# Altium PCB main.PcbDoc
Units mil, origin at the board's own origin, x right, y up, seen from the top; angles counter-clockwise.
Board outline 885.83 x 807.09 mil, 4 copper layers (Top Layer, Layer 1, Layer 2, Bottom Layer), stack 23.756 mil thick; 34 components, 17 nets, 109 pads, 61 vias.
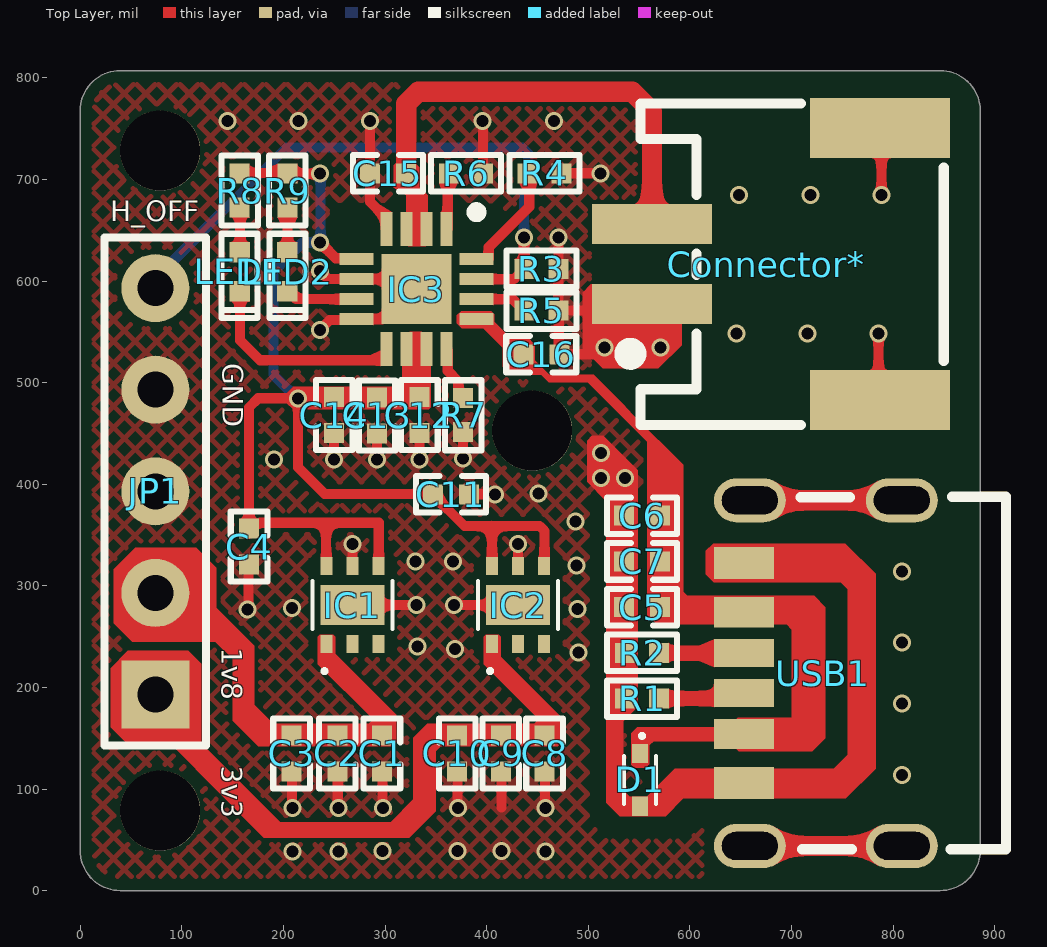
[diagram p0: Top Layer view]
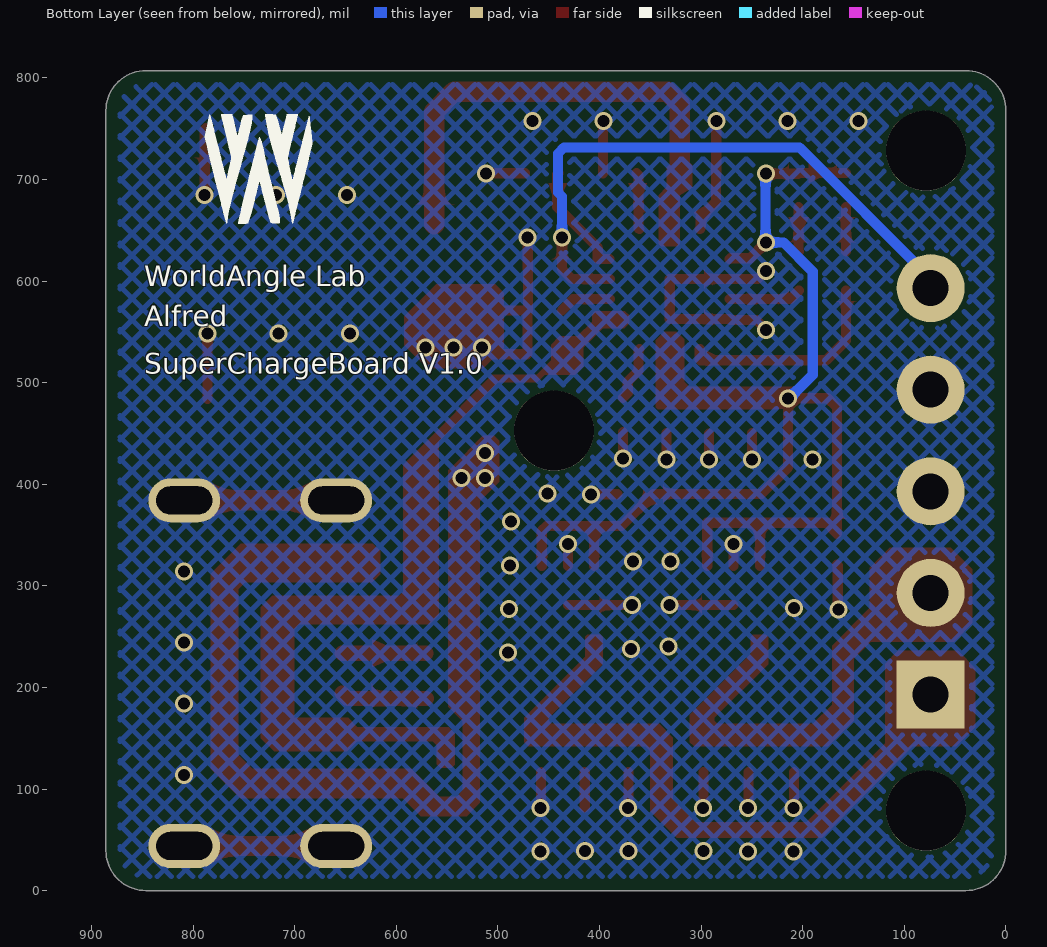
[diagram p1: Bottom Layer view, seen from below]
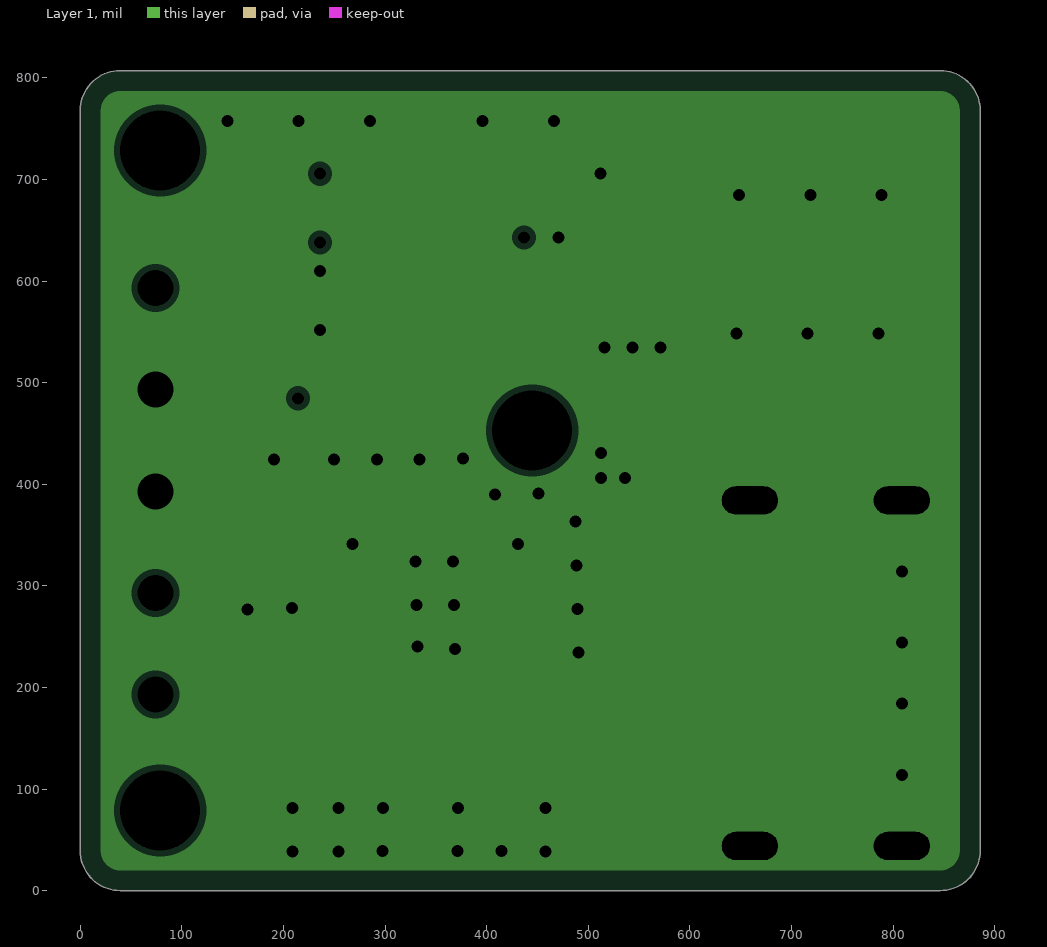
[diagram p2: Layer 1, clearances drawn from the general rule]
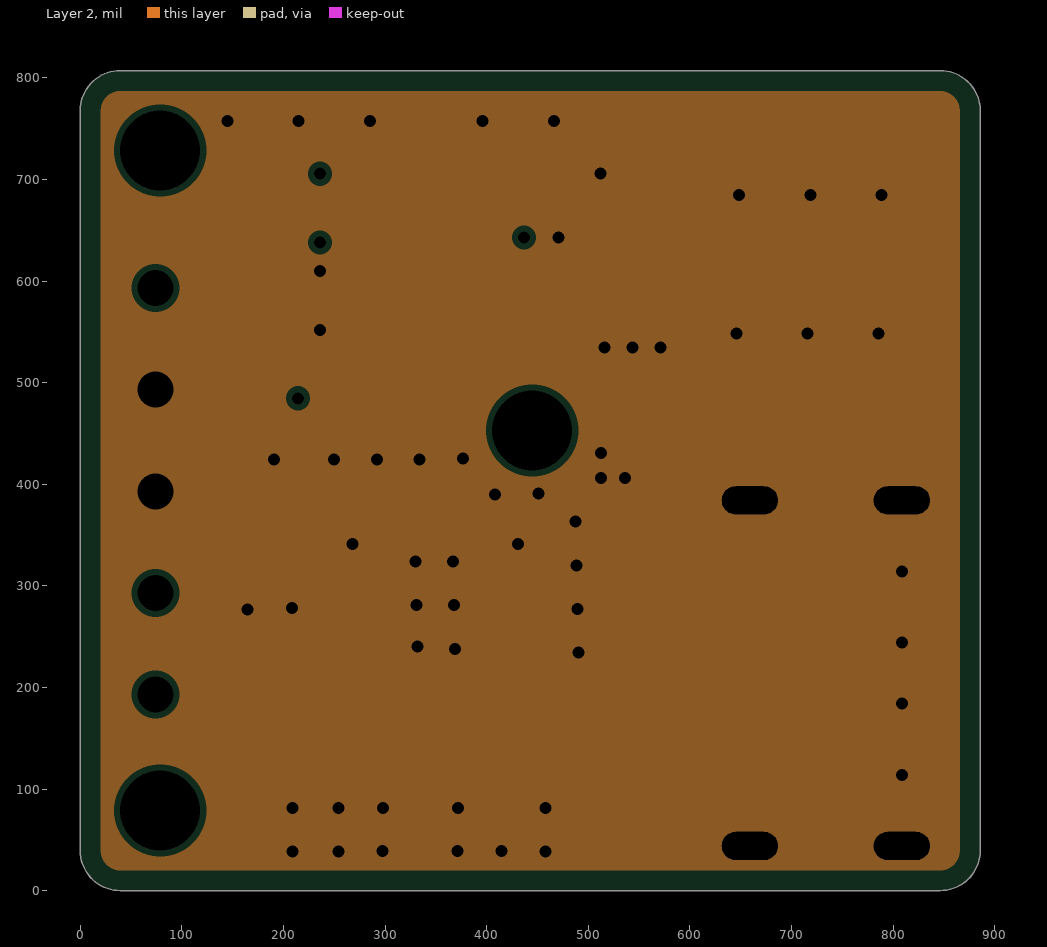
[diagram p3: Layer 2, clearances drawn from the general rule]

## Layer stack, top to bottom
Top Solder: solder mask 0.4, Solder Resist, Dk 3.5
Top Layer: signal copper 1.4
Dielectric 2: prepreg 2.8, PP-006, Dk 4.1
Layer 1: plane copper 1.378, net GND
Dielectric 1: dielectric 12.6, FR-4, Dk 4.8
Layer 2: plane copper 1.378, net GND
Dielectric 3: prepreg 2.8, PP-006, Dk 4.1
Bottom Layer: signal copper 1.4
Bottom Solder: solder mask 0.4, Solder Resist, Dk 3.5

## Board outline
0,39.37 0,767.72 cw(c39.37,767.72) 39.37,807.09 846.46,807.09 cw(c846.46,767.72) 885.83,767.72 885.83,39.37 cw(c846.46,39.37) 846.46,0 39.37,0 cw(c39.37,39.37)

## Design rules (kind name [scope] priority, off if disabled: settings)
AssemblyTestpoint [All] p1: testpointundercomponent=TRUE minsize=40 maxsize=100 preferedsize=60 minholesize=0 maxholesize=40 preferedholesize=32 testpointgrid=1 usegrid=TRUE gridoriginx=5938.69 gridoriginy=1846 gridtolerance=0.01 allowsidetop=TRUE allowsidebottom=TRUE
BoardOutlineClearance [All] p1: gap=10 ignorepadtopadclearanceinfootprint=FALSE
Clearance [All] p1: gap=4 ignorepadtopadclearanceinfootprint=FALSE
FabricationTestpoint [All] p1: side=3 testpointundercomponent=TRUE minsize=40 maxsize=100 preferedsize=60 minholesize=0 maxholesize=40 preferedholesize=32 testpointgrid=1 allowsidetop=TRUE allowsidebottom=TRUE usegrid=TRUE gridoriginx=5938.69 gridoriginy=1846 gridtolerance=0.01
PlaneClearance [All] p1: clearance=6
PlaneConnect [All] p1: pad.planeconnectstyle=Relief pad.reliefexpansion=20 pad.reliefentries=4 pad.reliefconductorwidth=10 pad.reliefairgap=10 via.planeconnectstyle=Direct via.reliefexpansion=20 via.reliefentries=4 via.reliefconductorwidth=10 via.reliefairgap=10
PolygonConnect [All] p1: connectstyle=Direct reliefconductorwidth=10 reliefentries=4 polygonreliefangle="90 Angle" airgapwidth=10
RoutingVias [All] p1: holewidth=28 width=50 viastyle="Through Hole" minholewidth=28 minwidth=50 maxholewidth=28 maxwidth=50
SolderMaskExpansion [All] p1: expansion=4 istentingtop=FALSE
SupplyNets "Schematic Supply Nets_5" [InNet('3v3')] p1: voltage=0.000
SupplyNets "Schematic Supply Nets_4" [InNet('Vbus')] p2: voltage=0.000
SupplyNets "Schematic Supply Nets_3" [InNet('VBAT+')] p3: voltage=0.000
SupplyNets "Schematic Supply Nets_2" [InNet('1v8')] p4: voltage=0.000
SupplyNets "Schematic Supply Nets_1" [InNet('GND')] p5: voltage=0.000
SupplyNets "Schematic Supply Nets" [InNet('Vpm')] p6: voltage=0.000
Width [All] p1: maxlimit=30 minlimit=10 preferedwidth=10 minimp=50.000000 maximp=50.000000 favimp=50.000000
26 further rules are at their usual default settings.

## Components (designator, comment, footprint, x,y, rotation, side; value= is the part's Value field where it differs from the comment)
C1 "2.2uF" C0402_L 297,135 r270 top
C2 "10uF(NC)" C0402_L 253,135 r270 top
C3 "0.1uF(NC)" C0402_L 208,135 r270 top
C4 "1uF" C0402_L 166.2,338.5 r270 top
C5 "10uF(NC)" C0402_L 553,279 r180 top
C6 "0.1uF(NC)" C0402_L 553,369 r0 top
C7 "1uF" C0402_L 553,324 r180 top
C8 "2.2uF" C0402_L 457,135 r270 top
C9 "10uF(NC)" C0402_L 414,135 r270 top
C10 "0.1uF(NC)" C0402_L 371,135 r270 top
C11 "1uF" C0402_L 364.78,390.1 r0 top
C12 "4.7uF" C0402_L 333.93,468 r270 top
C13 "10uF(NC)" C0402_L 292.13,467.68 r270 top
C14 "0.1uF(NC)" C0402_L 249.93,468 r270 top
C15 "4.7uF" C0402_L 302.93,706 r0 top
C16 "1uF" C0402_L 453.83,527.9 r0 top
Connector* "ZX-PH2.0-WT2P" ZX-PH2.0-WT2P 675,616.54 r90 top
D1 "LESD5D5.0CT1G" LESD5D50CT1G 551,109 r270 top
IC1 "TPS7A2618DRVR" TPS7A2633DRVR 268,281 r90 top
IC2 "TPS7A2633DRVR" TPS7A2633DRVR 431,281 r90 top
IC3 "BQ24075QRGTRQ1" QFN50P300X300X100-17N-D 330.93,592 r270 top
JP1 "HDR-1X5" HDR2.54-LI-5P 74,393 r90 top
LED1 "NCD0402R1" LED0402_R 156.93,609 r270 top
LED2 "NCD0402W1" LED0402_W 203.93,609 r270 top
R1 "5.1K(1%)" R0402_L 553,189 r0 top
R2 "5.1K(1%)" R0402_L 553,234 r0 top
R3 "1K" R0402_L 453.83,611.9 r180 top
R4 "1.8k" R0402_L 456.93,706 r0 top
R5 "45k" R0402_L 453.83,570.9 r180 top
R6 "10k" R0402_L 379.93,706 r0 top
R7 "1.5k" R0402_L 376.93,468 r90 top
R8 "1.5k" R0402_L 156.93,689 r270 top
R9 "1.5k" R0402_L 203.93,689 r270 top
USB1 "USB_TYPE-C_6Pin" USB-C-SMD_6P 731,214 r180 top

## Footprints (in the part's own frame and the unit in brackets; to place one, negate y for a bottom-side part, rotate by r counter-clockwise, add the part's x,y. Pads: shape width x height; smd on the part's side, far side on the other; paste and mask are expansions set on the pad)
C0402_L [mm] "贴片MLCC电容"
  rect 0.5x0.5 smd: 1(-0.45,0) 2(0.45,0)
  silkscreen extent -0.87,-0.46 0.88,0.46, body extent -0.5,-0.25 0.5,0.25, height 0.5
HDR2.54-LI-5P [mm] "排针，5脚"
  rect 1.7x1.7 hole 0.9: 1(-5.08,0)
  round 1.7 hole 0.9: 2(-2.54,0) 3(0,0) 4(2.54,0) 5(5.08,0)
  silkscreen extent -6.35,-1.27 6.35,1.27, body extent -6.35,-1.27 6.35,1.27, height 2.54
LED0402_R [mil] "红色0402LED"
  rect 20x20 smd: 1(-19.23,0) 2(19.23,0)
  silkscreen extent -38,-18 46,18, body extent -20,-10 20,10, height 8
LED0402_W [mil] "白色0402LED                                联系卖家 免费查找封装"
  rect 20x20 smd: 1(-19.23,0) 2(19.23,0)
  silkscreen extent -38,-18 46,18, body extent -20,-10 20,10, height 8
LESD5D50CT1G [mm]
  rect 0.48x0.4 smd: 1(-0.66,0) 2(0.66,0)
  silkscreen extent -1.15,-0.4 0.6,0.4, body extent -0.8,-0.4 0.8,0.4, height 0.6
QFN50P300X300X100-17N-D [mm]
  rect 0.85x0.3 smd: 1(-1.5,0.75) 2(-1.5,0.25) 3(-1.5,-0.25) 4(-1.5,-0.75) 9(1.5,-0.75) 10(1.5,-0.25) 11(1.5,0.25) 12(1.5,0.75)
  rect 0.3x0.85 smd: 5(-0.75,-1.5) 6(-0.25,-1.5) 7(0.25,-1.5) 8(0.75,-1.5) 13(0.75,1.5) 14(0.25,1.5) 15(-0.25,1.5) 16(-0.75,1.5)
  rect 1.75x1.75 smd: 17(0,0)
  silkscreen extent -2.05,1.38 -1.8,1.63, body extent -1.5,-1.5 1.5,1.5, height 1
R0402_L [mm] "1/16W贴片电阻"
  rect 0.5x0.5 smd: 1(-0.425,0) 2(0.425,0)
  silkscreen extent -0.88,-0.46 0.87,0.46, body extent -0.5,-0.25 0.5,0.25, height 0.3
TPS7A2633DRVR [mm]
  rect 0.45x0.3 smd: 1(-0.975,0.65) 2(-0.975,0) 3(-0.975,-0.65) 4(0.975,-0.65) 5(0.975,0) 6(0.975,0.65)
  rect 1x1.6 smd: 7(0,0)
  silkscreen extent -1.7,-1 0.6,1, body extent -1,-1 1,1, height 0.8
USB-C-SMD_6P [mil] "封装库来自淘宝ID:黄晶宝石"
  oval 70.82x43.31 hole 27.56 slot 55.16 at 0 deg: 0(-77.75,170.08) 0(-77.75,-170.08) 0(71.85,170.08) 0(71.85,-170.08)
  rect 59x27.6 smd: A5(77.76,19.7) B5(77.76,-19.7)
  rect 59x29.9 smd: A9(77.76,-59.85) B9(77.76,59.85)
  rect 59x31.5 smd: A12(77.76,-108.25) B12(77.76,108.25)
  silkscreen extent -180,-174 22,174, body extent -172,-176 95,176, height 127
ZX-PH2.0-WT2P [mm]
  rect 1x3 smd: 1(-1,2.85) 2(1,2.85)
  rect 1.5x3.5 smd: 3(-3.4,-2.85) 4(3.4,-2.85)
  silkscreen extent -4.02,-4.44 4.02,3.59

## Part data
C1 C2 C3 C4 C5 C6 C7 C8 C9 C10 C11 C12 C13 C14 C15 C16: library part C, "贴片电容/MLCC电容", BOM名称=无极性贴片电容, 当前库版本V2024.2.3 @淘宝卖家:黄晶宝石=最新版本发布https://item.taobao.com/item.htm?id=566775463719, 联系下单店铺卖家 免费帮你查找封装="联系下单店铺卖家 免费技术指导"
Connector*: "https://jlcpcb.com/partdetail/Megastar-ZX_PH2_0WT2P/C7429689"
D1: "TVS Diode (Bi-directional)", Manufacturer_Name=LRC, Height=0.7mm, Manufacturer_Part_Number=LESD5D5.0CT1G
IC1: library part TPS7A2633DRVR, "Integrated Circuit", Manufacturer_Name="Texas Instruments", Mouser Part Number=595-TPS7A2633DRVR, Arrow Part Number=TPS7A2633DRVR, Arrow Price/Stock=null?utm_currency=USD&region=nac, Datasheet Link=https://www.ti.com/lit/gpn/TPS7A26, Height=0.8mm, Manufacturer_Part_Number=TPS7A2633DRVR, Mouser Price/Stock=https://www.mouser.co.uk/ProductDetail/Texas-Instruments/TPS7A2633DRVR?qs=OTrKUuiFdkZcobdYhR7qbQ%3D%3D
IC2: "Integrated Circuit", Manufacturer_Name="Texas Instruments", Mouser Part Number=595-TPS7A2633DRVR, Arrow Part Number=TPS7A2633DRVR, Arrow Price/Stock=null?utm_currency=USD&region=nac, Datasheet Link=https://www.ti.com/lit/gpn/TPS7A26, Height=0.8mm, Manufacturer_Part_Number=TPS7A2633DRVR, Mouser Price/Stock=https://www.mouser.co.uk/ProductDetail/Texas-Instruments/TPS7A2633DRVR?qs=OTrKUuiFdkZcobdYhR7qbQ%3D%3D
IC3: "Integrated Circuit", Manufacturer_Name="Texas Instruments", Mouser Part Number=595-BQ24075QRGTRQ1, Arrow Part Number=BQ24075QRGTRQ1, Arrow Price/Stock=null?region=nac, Datasheet Link=http://www.ti.com/lit/gpn/bq24075-q1, Height=1mm, Manufacturer_Part_Number=BQ24075QRGTRQ1, Mouser Price/Stock=https://www.mouser.co.uk/ProductDetail/Texas-Instruments/BQ24075QRGTRQ1?qs=i8JZjLRTtkLLeOPMlhTMpg%3D%3D
JP1: library part "Header 5", "5P接插件", BOM名称=5P接插件, 封装库来自淘宝卖家ID：黄晶宝石=其他店铺购入均为盗版封装库，请立即申请退款，本店现金奖励50~200元, 联系卖家，免费查找封装=唯一出售店铺网址https://shop463601444.taobao.com
LED1 LED2: library part LED, BOM名称=贴片LED, 封装库来自淘宝卖家：黄晶宝石=其他店铺购入均为盗版封装库，无更新权益，请立即申请退款，本店现金奖励200~1000元
R1 R2 R3 R6 R8 R9: library part R, "贴片电阻", BOM名称=贴片电阻, 联系下单店铺卖家 免费帮你查找封装="联系下单店铺卖家 免费技术指导"
R4: library part R, "RISET = 890 AΩ / 0.5A = 1.8k", BOM名称=贴片电阻, 联系下单店铺卖家 免费帮你查找封装="联系下单店铺卖家 免费技术指导"
R5: library part R, "K_TMR ≈48s/kΩ / tMAXCHG / (10 × KTMR ) / (6.25 hr × 3600 s/hr) / (10 × 48 s/kΩ) = 46.8 kΩ / 6h is 45k", BOM名称=贴片电阻, 联系下单店铺卖家 免费帮你查找封装="联系下单店铺卖家 免费技术指导"
R7: library part R, "1.5k 1A limitation of input /  / RISET = 1550 AΩ / 1 A = 1.5k", BOM名称=贴片电阻, 联系下单店铺卖家 免费帮你查找封装="联系下单店铺卖家 免费技术指导"
USB1: "USB_TYPE-C_6Pin母座", 当前库版本V2024.2.3 @淘宝卖家:黄晶宝石=最新版本发布https://item.taobao.com/item.htm?id=566775463719, 联系下单店铺卖家 免费技术支持="联系下单店铺卖家 免费帮你查找封装"

## Free pads (board coordinates)
  round 78.74 hole 78.74: 2(78.74,78.74) 2(78.74,728.35) 2(444.88,452.76)

## Via types
v1: diameter 17.72, hole 11.81, Top Layer to Bottom Layer, tented both sides, 61 vias

## Nets (pads, with @x,y where several pads share a name; then routed paths per layer and width w, separated by ;. In a path a pad name is that pad's centre, name@x,y a point inside that pad or via, vN(x,y) a via of type N, cw(c..) or ccw(c..) an arc to the next point about the centre after c; other vN are vias at no path point)
1v8: C1.1 C2.1 C3.1 IC1.1 JP1.2
3v3: C8.1 C9.1 C10.1 IC2.1 JP1.1
GND: C1.2 C2.2 C3.2 C4.2 C5.2 C6.1 C7.2 C8.2 C9.2 C10.2 C11.2 C12.2 C13.2 C14.2 C15.1 C16.2 Connector*.1 Connector*.3 Connector*.4 D1.2 IC1.5 IC1.7 IC2.5 IC2.7 IC3.4 IC3.6 IC3.8 IC3.17 JP1.3 JP1.4 R1.1 R2.1 R3.1 R4.2 R5.1 R6.2 R7.1 USB1.0 USB1.A12 USB1.B12 | length 1727.4
  Top Layer w10: v1(164.9,276.5) 165.55,277.15 165.55,320.13 C4.2 ; v1@208.5,81.77 C3.2@208.5,116.78 ; v1(235.93,552) 245.5,561.57 270.97,561.57 IC3.8 330.93,562.47 IC3.17 330.93,601.84 IC3.6 244.44,601.84 236.29,610 v1(235.93,610) ; v1(249.93,424.55) C14.2 ; v1@253.5,81.77 C2.2@253.5,116.78 ; IC1.7 v1(331,281) ; IC1.5 v1(268,341) ; v1@285.1,758.2 285.16,758.14 285.16,706.06 C15.1 285.21,678.07 300.5,662.79 300.5,651.96 IC3.4 ; v1(292.13,424.23) C13.2 ; v1@297.5,81.77 C1.2@297.5,116.78 ; v1(333.93,424.55) C12.2 ; v1(368,281) IC2.7 ; v1@371.5,81.77 C10.2@371.5,116.78 ; v1(376.93,425.54) R7.1 ; C11.2 v1(408.23,390.1) ; v1@396.2,757.9 396.43,757.67 396.43,706.23 R6.2 ; 414.5,81.77 C9.2@414.5,116.78 ; IC2.5 v1(431,341) ; v1@457.5,81.77 C8.2@457.5,116.78 ; v1(470.7,642.8) 470.63,642.73 470.63,611.97 R3.1 R5.1 ; R4.2 v1(511.93,706) ; v1@515.3,527.4 v1@515.8,526.9 ; v1(515.8,534.77) 513.71,534.77 506.84,527.9 C16.2 471.05,528.39 471.05,570.41 R5.1 ; C6.1@534.78,368.5 535.64,369.36 535.64,405.64 v1(536,406) ; Connector*.1 556.52,570.9 R5.1 ; Connector*.3@785.8,484.09 v1(785.8,548.39) ; Connector*.4 788.6,749 v1(788.6,684.7)
  Top Layer w20: USB1.0@659.16,43.93 USB1.0@808.75,43.93 ; USB1.0@659.48,384.09 USB1.0@809.06,384.09
  Top Layer w30: USB1.A12@653.55,322.25 655.77,322.25 USB1.A12@656.51,322.99 ; USB1.0@656.51,381.12 USB1.0@659.48,384.09
  other v1: 209,38.27 254,38.27 458,38.27 297.5,38.77 371.5,38.77 414.5,38.77 209,81.27 254,81.27 298,81.27 372,81.27 458,81.27 808.75,113.92 808.75,183.92 490.24,234.2 368.98,238 331.97,240.32 808.75,244.08 489.25,277.2 208.55,278.13 808.75,314.08 488.27,320.2 330.02,324 367.02,324 487.28,363.2 451.23,391.08 512.65,406.1 190.5,424.55 512.65,430.8 543.55,534.77 571.3,534.77 645.8,548.39 715.8,548.39 648.6,684.7 718.6,684.7 145.1,757.4 215.1,757.4 285.1,757.4 396.2,757.4 466.2,757.4
NetIC3_1: IC3.1 R6.1 | length 56.2
  Top Layer w10: IC3.1@360.77,651.06 361.68,651.96 361.68,704.18 R6.1@363.58,706.08
NetIC3_7: IC3.7 LED2.2 | length 71.7
  Top Layer w10: LED2.2@203.96,590.54 212.34,582.16 IC3.7@272.19,582.16
NetIC3_9: IC3.9 LED1.2 | length 211.6
  Top Layer w10: LED1.2@157.24,590.54 157.24,541.69 176.93,522 300.5,522 301.4,522.91 IC3.9
NetIC3_12: IC3.12 R7.2 | length 54.5
  Top Layer w10: IC3.12@360.77,532.94 361.68,532.04 361.68,511.56 372.09,501.15 372.09,489.98 R7.2@376.93,485.14
NetIC3_14: IC3.14 R5.2 | length 51.8
  Top Layer w10: IC3.14 425.84,582.16 R5.2
NetIC3_16: IC3.16 R4.1 | length 112.9
  Top Layer w10: IC3.16@390.3,621.53 401.13,621.53 402.03,622.43 402.03,633.26 441.93,673.16 441.93,704.66 R4.1@440.51,706.08
NetLED1_1: LED1.1 R8.2 | length 43.9
  Top Layer w10: LED1.1@157.24,629 157.39,629.14 157.39,672.63 R8.2@157.53,672.77
NetLED2_1: LED2.1 R9.2 | length 43.9
  Top Layer w10: LED2.1@203.96,629 204.1,629.14 204.1,672.63 R9.2@204.24,672.77
NetR1_2: R1.2 USB1.A5 | length 85.3
  Top Layer w15: R1.2@570.46,189 648.25,189 USB1.A5@653.55,194.3
NetR2_2: R2.2 USB1.B5 | length 82.8
  Top Layer w15: R2.2@570.76,233.7 USB1.B5@653.55,233.7
SYSOFF: IC3.15 JP1.5 R3.2 | length 598.8
  Top Layer w10: IC3.15 427.04,601.84 R3.2 437.01,611.99 437.01,642.79 v1(436.91,642.89)
  Bottom Layer w10: JP1.5 74,602.37 203.03,731.4 435.07,731.4 440.93,725.54 440.93,687.27 436.91,683.25 v1(436.91,642.89)
VBAT+: C15.2 Connector*.2 IC3.2 IC3.3 | length 434.2
  Top Layer w20: C15.2@320.96,706.08 320.96,774.58 332.68,786.3 543.3,786.3 562.79,766.81 Connector*.2
Vbus: C5.1 C6.2 C7.1 C16.1 D1.1 IC3.13 USB1.A9 USB1.B9
Vpm: C4.1 C11.1 C12.1 C13.1 C14.1 IC1.4 IC1.6 IC2.4 IC2.6 IC3.5 IC3.10 IC3.11 R8.1 R9.1 | length 1186
  Top Layer w10: R8.1@157.53,706.23 204.24,706.23 204.86,705.62 v1(235.93,705.62) v1@236.31,705.62 ; C4.1@166.2,351.22 C4.1@171.04,356.06 ; v1(235.93,638) 251.5,622.43 270.97,622.43 IC3.5 ; IC1.6@242.09,319.71 242.09,362.09 ; IC1.4@293.91,319.39 293.91,362.09 242.09,362.09 ; C12.1@333.98,486.26 C12.1@334.24,486 ; C11.1@345.28,390.5 240.5,390.5 214.33,416.67 v1(214.33,484.6) 175.3,484.6 166.2,475.5 C4.1 171.04,361.06 175.87,361.06 176.9,362.09 242.09,362.09 ; C11.1 378.31,358.86 405.29,358.86 ; IC2.6 405.29,319.51 405.29,358.86 ; IC2.4@456.91,319.39 456.91,354.1 452.15,358.86 405.29,358.86
  Bottom Layer w10: v1(214.33,484.6) 213.28,484.6 190.13,507.75 190.13,609.2 218.93,638 v1(235.93,638) 236.93,638 236.62,638.31 236.62,705.31 v1@236.31,705.62
pads on no net: IC1.2 IC1.3 IC2.2 IC2.3

## Polygon pours and split planes (outlines as drawn)
GND on Top Layer "GND_L01_P011" (hatched 45Degree grid 15 track 5, remove dead copper, pour order 11): -1,1 0,2 0,805 880,805 888,797 888,0
GND on Bottom Layer "GND_L04_P013" (hatched 45Degree grid 15 track 5, remove dead copper, pour order 13): -0.1,-0.5 0.9,0.5 0.9,803.5 880.9,803.5 888.9,795.5 888.9,-1.5
GND on Layer 2 (split plane): 850.23,786.71 853.87,785.61 857.21,783.82 860.15,781.41 862.56,778.47 864.35,775.13 865.45,771.49 865.77,768.17 865.73,767.72 865.73,39.37 865.77,38.91 865.45,35.59 864.35,31.96 862.56,28.61 860.15,25.68 857.21,23.27 853.87,21.48 850.23,20.38 846.91,20.05 846.46,20.1 39.37,20.1 38.91,20.05 35.59,20.38 31.96,21.48 28.61,23.27 25.68,25.68 23.27,28.61 21.48,31.96 20.38,35.59 20.05,38.91 20.1,39.37 20.1,767.72 20.05,768.17 20.38,771.49 21.48,775.13 23.27,778.47 25.68,781.41 28.61,783.82 31.96,785.61 35.59,786.71 38.91,787.03 39.37,786.99 846.46,786.99 846.91,787.03
GND on Layer 1 (split plane): 850.23,786.71 853.87,785.61 857.21,783.82 860.15,781.41 862.56,778.47 864.35,775.13 865.45,771.49 865.77,768.17 865.73,767.72 865.73,39.37 865.77,38.91 865.45,35.59 864.35,31.96 862.56,28.61 860.15,25.68 857.21,23.27 853.87,21.48 850.23,20.38 846.91,20.05 846.46,20.1 39.37,20.1 38.91,20.05 35.59,20.38 31.96,21.48 28.61,23.27 25.68,25.68 23.27,28.61 21.48,31.96 20.38,35.59 20.05,38.91 20.1,39.37 20.1,767.72 20.05,768.17 20.38,771.49 21.48,775.13 23.27,778.47 25.68,781.41 28.61,783.82 31.96,785.61 35.59,786.71 38.91,787.03 39.37,786.99 846.46,786.99 846.91,787.03

## Other copper
Top Layer:
  pour cut-out: 449.51,626.81 447.4,624.7 447.4,522.1 461.9,507.6 461.9,626.5 461.36,627.04
  region net Vbus: 423.96,507.6 415.83,515.74 415.83,534.27 396.6,553.5 375.7,553.5 370.8,558.4 370.8,566.1 375,570.3 391.2,570.3 404.6,570.3 407.4,567.5 407.4,559.9 421.9,545.4 439.4,545.4 447.4,537.4 447.4,522.1 461.9,507.6 505.4,507.6 533.9,479.1 544.06,468.26 593.31,419 593.31,294 597.31,290 722.31,290 733.31,279 733.31,150 720.31,137 648.31,137 638.31,147 564.31,147 560.31,143 560.31,124.31 557,121 545.31,121 542.31,124 542.31,155.11 548.2,161 638.31,161 647.31,170 700.31,170 700.31,257 695.31,262 567.31,262 558.31,271 558.31,441.79 499.7,500.4 461.1,500.4 453.9,507.6
  region net GND: 502.6,596.7 494.5,588.6 494.5,533.9 514.4,514 569.1,514 592,536.9 592,565.3 560.6,596.7
  region net 1v8: 133.8,317.7 133.8,278.4 171.1,241.1 171.1,182.83 189.93,164 284,164 287,167 287,170 234,223 234,250 236,252 249,252 251,250 251,233.3 311,173.3 311,146 307,142 175,142 150,167 150,228.1 133.1,245 51,245 33,263 33,316.1 54.2,337.3 114.2,337.3
  pour cut-out: 549.2,788.2 568.4,807.4 577.3,807.09 870.2,807.09 870.2,408 609.67,408 504.1,513.57 504.1,636.5 549.2,681.6
  region net 3v3: 48.7,142 91.59,142 180.8,51.99 181.7,52 324,52 350,78 350,137 355,142 470,142 474,146 474,170 414,230 414,250 412,252 399,252 397,250 397,223 450,170 450,167 447,164 341.34,164 328,150.66 328,90 305.5,67.5 196.7,67.5 119,145.2 119,223.4 106.4,236 47,236 30,219 30,160.7
  pour cut-out: 614.3,409.5 614.3,446.8 885.83,446.8 885.83,0 614.93,0
  region net GND: 534.4,98.9 540.7,92.6 557.6,92.6 585.1,120.1 741.9,120.1 755.6,133.8 755.6,296.7 748.8,303.5 623.6,303.5 615.8,311.3 615.8,334.4 623,341.6 752.9,341.6 782.8,311.7 782.8,120.1 753.7,91 593.7,91 576.1,73.4 530.9,73.4 517.8,86.5 517.8,183 517.8,383.3 498.9,402.2 498.9,442.8 503.6,447.5 514.9,447.5 545.2,417.2 548.7,413.7 548.7,180.8 534.4,166.5
  region net Vpm: 316.83,501 311.73,495.9 209.83,495.9 203.83,489.9 203.83,479.4 209.13,474.1 224.13,474 342.93,474 344.83,475.9 344.83,541.5 336.33,550 324.33,550 316.83,542.5
  region net VBAT+: 312.23,717.4 308.73,713.9 308.73,691.56 320.93,684.38 320.93,636 322.93,634 339.93,634 341.93,636 341.93,684.6 333.63,692.9 333.63,712.2 328.43,717.4
  pour cut-out: 387.8,327.4 387.8,233.3 474.5,233.3 474.5,328
  pour cut-out: 224.8,327.4 224.8,233.3 311.5,233.3 311.5,328
  pour cut-out: 246.23,676.5 246.23,507.6 415.83,507.6 415.83,676.3
  pour cut-out: 502,68.5 519,51.5 597.6,51.5 622.2,76.1 694,76.1 703.8,85.9 703.8,116.7 691.1,129.4 600.6,129.4 600.4,129.2 577.2,129.2 546.6,98.6 528,98.6 528,149 552,173 552,386 546,392 505,392 502,389

## Silkscreen, mask and mechanical layers (free items; w line width, h text height)
Top Overlay:
  text "H_OFF" at 29.6,658.63 h20
  text "GND" at 140.3,519.2 h20 r270
  text "1v8" at 139.1,239 h20 r270
  text "3v3" at 139.1,122.7 h20 r270
Bottom Overlay:
  drawing of 3 lines, arcs and shapes, not listed
  text "WorldAngle Lab" at 848.1,595.01 h20
  text "Alfred" at 848.1,555.32 h20
  text "SuperChargeBoard V1.0" at 848.1,508.96 h20
Mechanical 1:
  the board outline again, w10